# Altium PCB GPS_WS_NEO7M трафарет TOP.PcbDoc
Units mm, origin at the board's own origin, x right, y up, seen from the top; angles counter-clockwise.
Board outline 32.5 x 32.5 mm, 4 copper layers (Top Layer, GND, PWR, Bottom Layer), stack 1.17 mm thick; 17 components, 25 nets, 64 pads, 0 vias.
Unrouted connection lines stored in the file: 31.
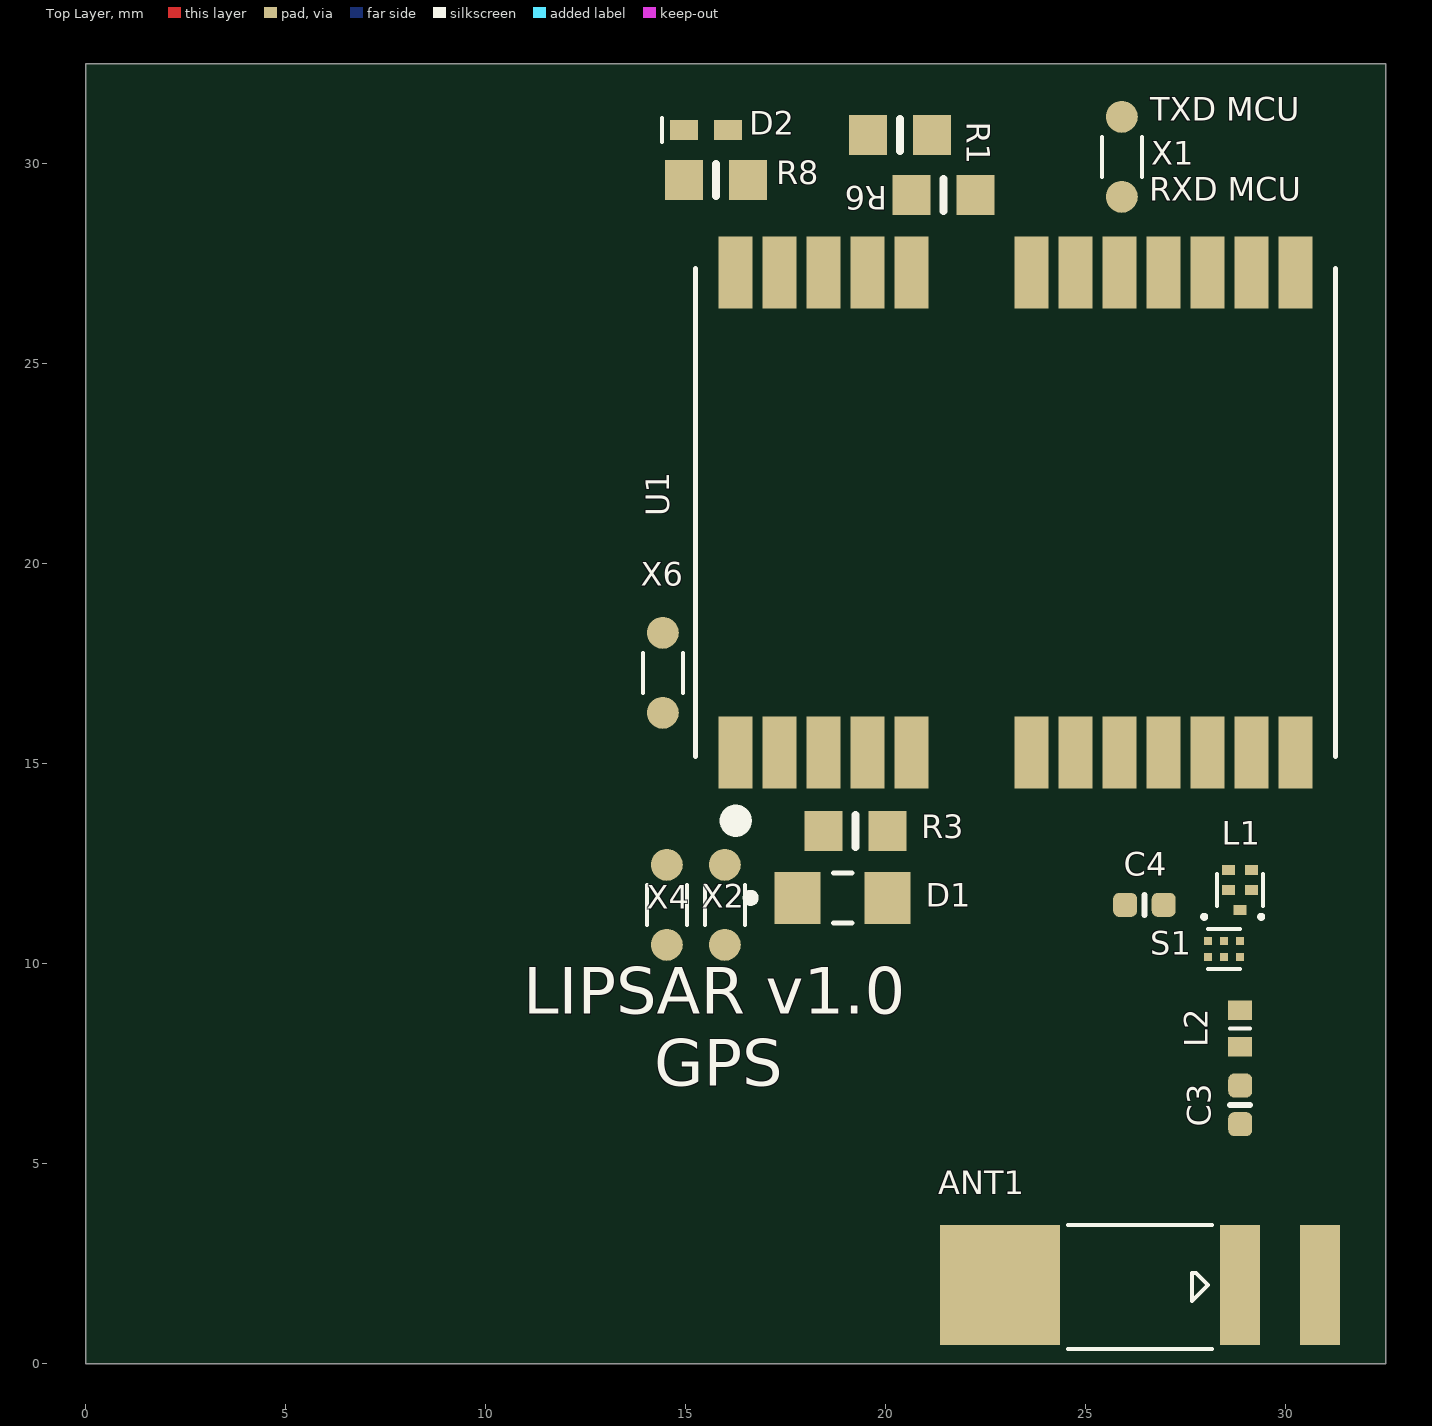
[diagram p0: Top Layer view]
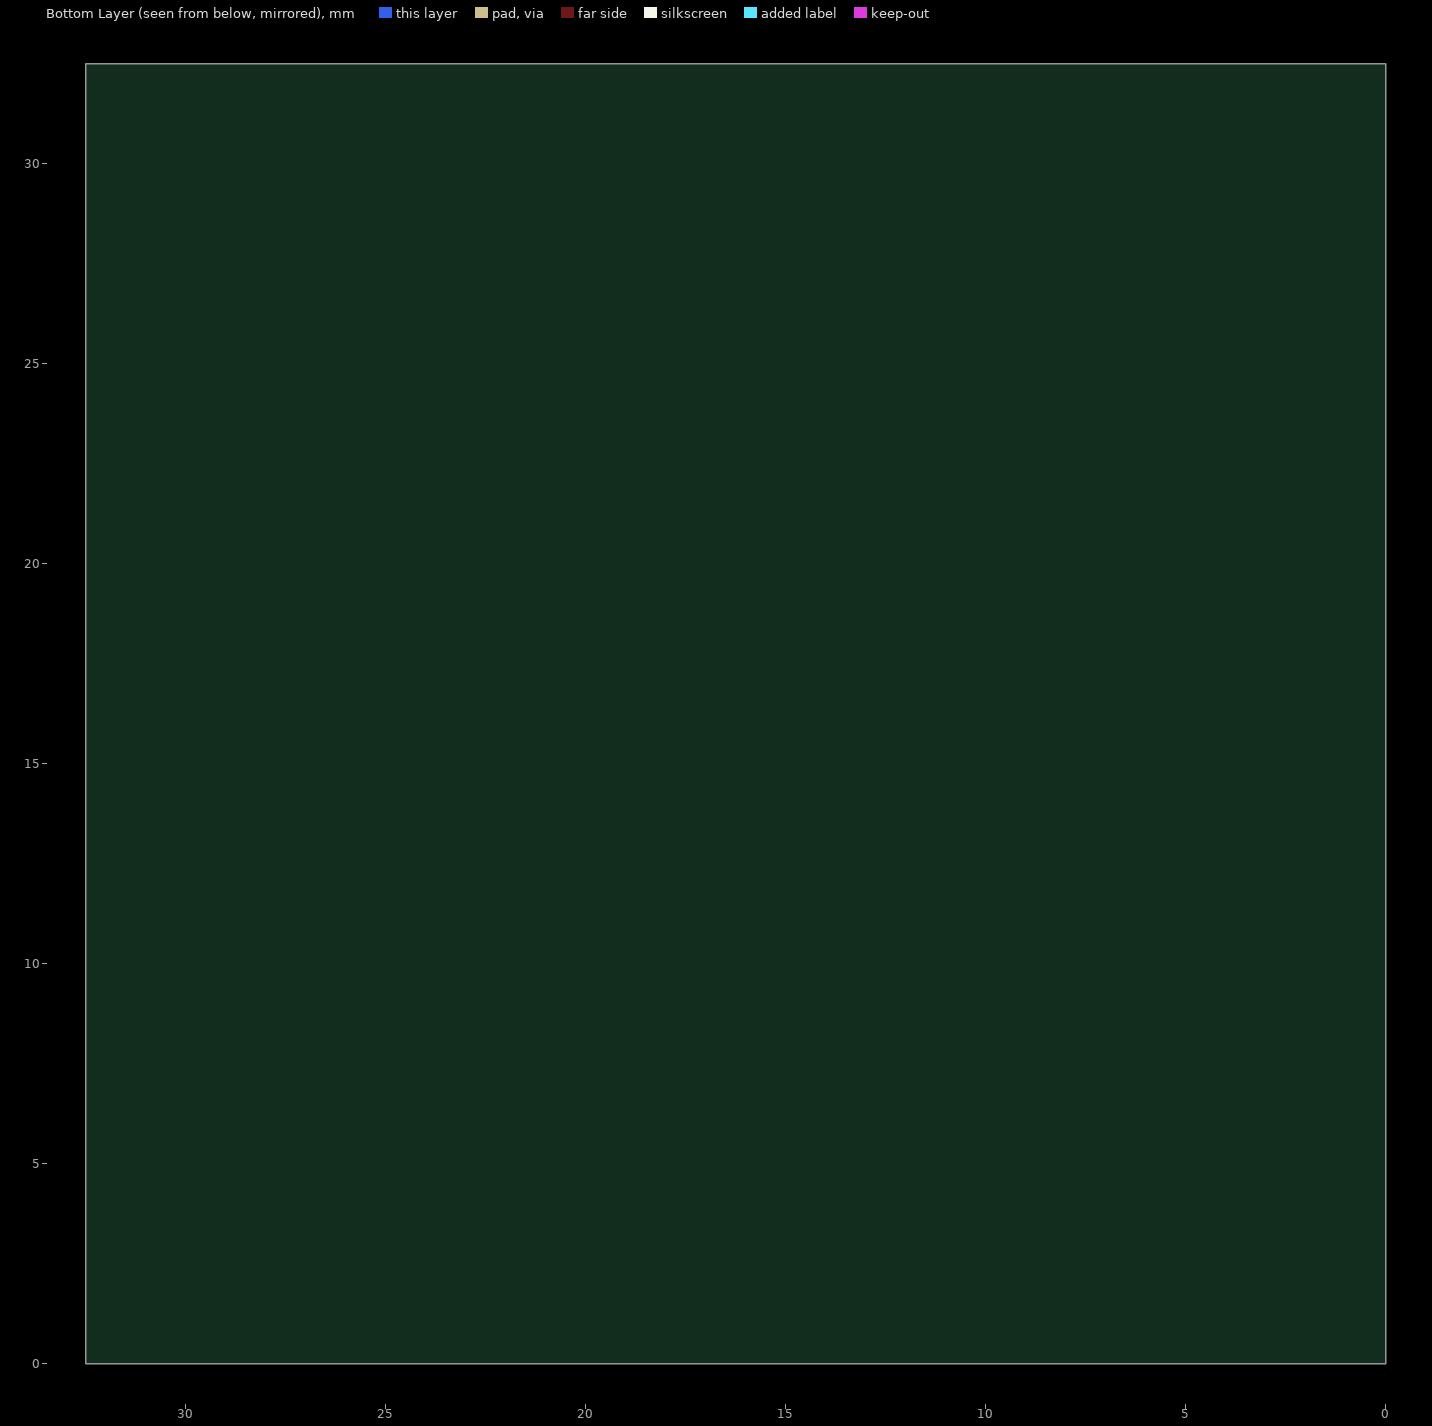
[diagram p1: Bottom Layer view, seen from below]

## Layer stack, top to bottom
Top Solder: solder mask 0.0254, SM-002, Dk 4
Top Layer: signal copper 0.045
Dielectric 2: prepreg 0.125, FR4_HiTg170 PR, Dk 5.07
Dielectric 3: prepreg 0.125, FR4_HiTg170 PR, Dk 5.07
Dielectric 8: prepreg 0.125, FR4_HiTg170 PR, Dk 5.07
GND: signal copper 0.015
Dielectric 1: core 0.3, FR4 Tg150, Dk 4.6
PWR: signal copper 0.015
Dielectric 9: prepreg 0.125, FR4_HiTg170 PR, Dk 5.07
Dielectric 4: prepreg 0.125, FR4_HiTg170 PR, Dk 5.07
Dielectric 5: prepreg 0.125, FR4_HiTg170 PR, Dk 5.07
Bottom Layer: signal copper 0.045
Bottom Solder: solder mask 0.0254, SM-002, Dk 4

## Board outline
0,0 0,32.5 32.5,32.5 32.5,0

## Design rules (kind name [scope] priority, off if disabled: settings)
AcuteAngle [All] p1: minimum=3.50000000000000E+0001 checktracksonly=FALSE
BoardOutlineClearance "BoardOutlineClearance 1" [All] p1: gap=0.25 ignorepadtopadclearanceinfootprint=FALSE except(0: Arc-SplitContinuation Track-SplitContinuation SMDPad-SplitContinuation THPad-SplitContinuation Via-SplitContinuation Fill-SplitContinuation Poly-SplitContinuation Region-SplitContinuation Text-SplitContinuation) // Milling
BoardOutlineClearance "BoardOutlineClearance 2" [All] p2: gap=0.4 ignorepadtopadclearanceinfootprint=FALSE except(0: Arc-SplitContinuation Track-SplitContinuation SMDPad-SplitContinuation THPad-SplitContinuation Via-SplitContinuation Fill-SplitContinuation Poly-SplitContinuation Region-SplitContinuation Text-SplitContinuation) // V-Cut
Clearance "Stitching GND" [IsStitchingVia and InNet('GND') vs (IsVia and (Not IsStitchingVia)) Or IsPad] p1: gap=0.127 ignorepadtopadclearanceinfootprint=FALSE
Clearance "Clearance-1 1/2 Oz" [All] p2: gap=0.125 ignorepadtopadclearanceinfootprint=FALSE except(0.2: Arc-Fill Arc-Poly Track-Fill Track-Poly SMDPad-SMDPad SMDPad-Fill SMDPad-Poly THPad-Fill THPad-Poly Via-Fill Via-Poly Fill-Fill Fill-Poly Poly-Poly Poly-Region Poly-Text; 0.25: Arc-Hole Track-Hole SMDPad-Hole THPad-Hole Via-Hole Fill-Hole Poly-Hole Region-Hole Text-Hole) // Standart
DiffPairsRouting "DiffPairsRouting 1 Oz" [All] p1: maxlimit=0.254 minlimit=0.2 mostfreqgap=0.254 toplayer_minwidth=0.2 toplayer_maxwidth=0.381 toplayer_prefwidth=0.381 midlayer1_minwidth=0.2 midlayer1_maxwidth=0.381 midlayer1_prefwidth=0.381 midlayer2_minwidth=0.2 midlayer2_maxwidth=0.381 midlayer2_prefwidth=0.381 bottomlayer_minwidth=0.2 bottomlayer_maxwidth=0.381 bottomlayer_prefwidth=0.381 maxuncoupledlength=12.7
DiffPairsRouting "DiffPairsRouting 1/2 Oz" [All] p2: maxlimit=0.254 minlimit=0.1 mostfreqgap=0.254 toplayer_minwidth=0.1 toplayer_maxwidth=0.381 toplayer_prefwidth=0.381 midlayer1_minwidth=0.1 midlayer1_maxwidth=0.381 midlayer1_prefwidth=0.381 midlayer2_minwidth=0.1 midlayer2_maxwidth=0.381 midlayer2_prefwidth=0.381 bottomlayer_minwidth=0.1 bottomlayer_maxwidth=0.381 bottomlayer_prefwidth=0.381 maxuncoupledlength=12.7
HoleSize "Minimum HoleSize" [IsPad] p1: absolutevalues=TRUE maxlimit=5.9 minlimit=0.6 maxpercent=80.000 minpercent=20.000
HoleSize "Minimum HoleSize VIA 1" [IsVia] p2: absolutevalues=TRUE maxlimit=5.9 minlimit=0.3 maxpercent=80.000 minpercent=20.000 // Standart
HoleToHoleClearance Hole2HoleClearance [All] p1: gap=0.25 allowstackedmicrovias=FALSE
MinimumAnnularRing "Minimum AR VIA Standart" [IsVia] p1: minimumring=0.15
MinimumAnnularRing "Minimum AR PAD Standart" [IsPAD] p2: minimumring=0.2
MinimumAnnularRing "Minimum AR VIA Advance" [IsVia] p3: minimumring=0.1
MinimumAnnularRing "Minimum AR PAD Advance" [IsPAD] p4: minimumring=0.15
MinimumSolderMaskSliver "SolderMask Bridge Standart" [All] p1: minsoldermaskwidth=0.15 // All Masks
PlaneClearance "PlaneClearance-1 1/2 Oz" [All] p1: clearance=0.2 // Standart
PlaneConnect "TermalConnect-1 1/2 Oz" [All] p1: planeconnectstyle=Direct reliefexpansion=0.2 reliefentries=4 reliefconductorwidth=0.2 reliefairgap=0.2 // Standart
PolygonConnect "PolygonConnect-1 1/2 Oz" [All] p1: connectstyle=Direct reliefconductorwidth=0.15 reliefentries=4 polygonreliefangle="90 Angle" airgapwidth=0.2 // Standart
RoutingCorners [All] p1 off: cornerstyle=45-Degree minsetback=2.54 maxsetback=2.54
RoutingVias [All] p1: holewidth=0.3 width=0.6 viastyle="Through Hole" minholewidth=0.2 minwidth=0.4 maxholewidth=5.9 maxwidth=6.4
SilkToSilkClearance Silk2SilkClearance [All] p1 off: silktosilkclearance=0.15
SilkToSolderMaskClearance Silk2SolderMaskClearance [IsPad] p1 off: minsilkscreentomaskgap=0.15 clearancetoexposedcopper=TRUE
SolderMaskExpansion [IsVia] p1: expansion=0.102 istentingtop=TRUE
SolderMaskExpansion SolderMaskExpansion-1 [All] p2: expansion=0.05 istentingtop=FALSE // Standart
SolderMaskExpansion "SolderMaskExpansion LDI" [All] p3: expansion=0.025 istentingtop=FALSE // Advance
UnRoutedNet [All] p1: checkbadconnections=TRUE
Width "Width 1/2 Oz" [All] p1: maxlimit=10 minlimit=0.1 preferedwidth=0.125 checkconnectedcopper=TRUE
20 further rules are at their usual default settings.

## Components (designator, comment, footprint, x,y, rotation, side; value= is the part's Value field where it differs from the comment)
ANT1 "GPS ANT" "ANTENNA GPS" 26.26,1.875 r180 top
C3 "STD_CAP" CAPC1005X55N 28.86,6.475 r90 top value="100 pF"
C4 "STD_CAP" CAPC1005X55N 26.464,11.475 r180 top value="1.0 uF"
D1 "7012X1" LED_7012X1 18.922,11.65 r0 top
D2 "RB520S30T1G" SOD523 15.5,30.85 r180 top
L1 "SAW" "SAW Filter" 28.86,11.35 r180 top
L2 "L0402" L0402 28.86,8.38 r90 top
R1 "STD_RES" RESC1608X50AN 20.35,30.725 r180 top value="1 kOm"
R3 "STD_RES" RESC1608X50AN 19.247,13.325 r180 top value="1 kOm"
R6 "STD_RES" RESC1608X50AN 21.447,29.225 r180 top value="1 kOm"
R8 "STD_RES" RESC1608X50AN 15.75,29.6 r0 top value="1 kOm"
S1 "BGA524N6" SW_BGS12WN6E6327XTSA1 28.46,10.375 r270 top
U1 "NEO-7M-0" XCVR_NEO-7M-0 23.247,21.278 r90 top
X1 "CON2_Uni" Con2_uni 25.9,29.175 r90 top
X2 "CON2_Uni" Con2_uni 15.975,12.475 r270 top
X4 "CON2_Uni" Con2_uni 14.525,12.475 r270 top
X6 "CON2_Uni" Con2_uni 14.425,16.275 r90 top

## Footprints (in the part's own frame and the unit in brackets; to place one, negate y for a bottom-side part, rotate by r counter-clockwise, add the part's x,y. Pads: shape width x height; smd on the part's side, far side on the other; paste and mask are expansions set on the pad)
"ANTENNA GPS" [mm]
  rect 1x3 smd: 1(-2.6,-0.1) 2(-4.6,-0.1)
  rect 3x3 smd: 3(3.4,-0.1)
  silkscreen extent -1.9,-1.6 1.7,1.5, body extent -5.1,-1.6 4.9,1.4, height 3.1
CAPC1005X55N [mm] "Chip Capacitor, 2-Leads, Body 1,0x0,5mm, IPC Medium Density"
  rrect50% 0.6x0.6 smd mask+0.05: 1(-0.483,0) 2(0.483,0)
  silkscreen extent 0,-0.25 0,0.25, body extent -0.5,-0.25 0.5,0.25, height 0.6
Con2_uni [mm]
  round 0.8 smd: 1(0,0) 2(2,0)
  silkscreen extent 0.5,-0.5 1.5,0.5
L0402 [mm]
  rect 0.49x0.6 smd: 1(-0.455,0) 2(0.455,0)
  silkscreen extent 0,-0.25 0,0.25, body extent -0.5,-0.25 0.5,0.25, height 0.44
LED_7012X1 [mm]
  rect 1.15x1.3 smd: A(1.125,0) C(-1.125,0)
  silkscreen extent -2.4,-0.63 0.23,0.63, body extent -1,-0.62 1,0.62, height 0.73
RESC1608X50AN [mm] "Chip Resistor, 2-Leads, Body 1,6x0,8mm, IPC Medium Density"
  rect 0.95x1 smd: 1(-0.8,0)
  rect 0.95x1 smd mask+0.1: 2(0.8,0)
  silkscreen extent 0,-0.4 0,0.4, body extent -0.8,-0.4 0.8,0.4, height 0.5
"SAW Filter" [mm]
  rect 0.325x0.25 smd paste-1 mask+0: 1(0,0) 2(0.288,-0.5) 3(0.288,-1) 4(-0.288,-1) 5(-0.288,-0.5)
  silkscreen extent -0.58,-0.9 0.58,0.22
SOD523 [mm]
  rect 0.7x0.5 smd: 1(0.55,0) 2(-0.55,0)
  silkscreen extent 1.1,-0.3 1.1,0.3, body extent -0.79,-0.38 0.81,0.42, height 0.65
SW_BGS12WN6E6327XTSA1 [mm]
  rect 0.2x0.2 smd paste-1 mask+0: 1(-0.2,-0.4) 2(-0.2,0) 3(-0.2,0.4) 4(0.2,0.4) 5(0.2,0) 6(0.2,-0.4)
  silkscreen extent -0.85,-0.55 0.5,0.4
XCVR_NEO-7M-0 [mm]
  rect 1.8x0.85 smd: 1(-6,7) 2(-6,5.9) 3(-6,4.8) 4(-6,3.7) 5(-6,2.6) 6(-6,-0.4) 7(-6,-1.5) 8(-6,-2.6) 9(-6,-3.7) 10(-6,-4.8) 11(-6,-5.9) 12(6,-5.9) 13(6,-7) 14(6,-4.8) 15(-6,-7) 16(6,-3.7) 17(6,-2.6) 18(6,-1.5) 19(6,-0.4) 20(6,2.6) 21(6,3.7) 22(6,4.8) 23(6,5.9) 24(6,7)
  silkscreen extent -7.9,-8 6.1,8, body extent -6.1,-8 6.1,8, height 2.6

## Part data
C3: library part 3763, Dielectric="C0G (NP0)", Manufacturer=muRata, ManufacturerPartNumber=GRM1555C1H101GA01D, Temp_Range="25 to 125°C", Voltage_Range=50V, AuthorModification_Comp=anosova, BOM="Конденсатор 0402 100 pF ±2% 50V  C0G (NP0)    GRM1555C1H101GA01D muRata", Comp_Class_Name="Capacitors Chip SMD 0402", Comp_Class_Number=200003, Comp_Description="Capacitors 0402 100 pF ±2% 50V  C0G (NP0)", Comp_ID=200003-0362, ComponentLink1Description=MANUFACTURER_URL, ComponentLink1URL=http://www.murata.com/products/catalog/pdf/c02e.pdf, Footprint_Description="Chip Capacitor EIA 0402. METRIC 1005, 2-Leads, Body 1,00x0,5mm, IPC Medium Density", HelpURL=\\corp1\RNDlibrary\_Library\Altium_lib\Datasheet\muRata\Chip_Monolithic_Ceramic_Capacitors\Chip_Monolithic_Ceramic_Capacitors.pdf, Human_Readable="Конденсатор 0402 100 pF ±2% 50V  C0G (NP0)", Lib_Description=Capacitor, Number_Base=3763, Precision=±2%, Price=0,0270000007003546, TimeModification_Comp="18.11.2021 12:51:46"
C4: library part 5280, Dielectric=X5R, Manufacturer=muRata, ManufacturerPartNumber=GRM155R61A105K, Temp_Range="-55°C to +85°C", Voltage_Range=10V, AuthorCreation_Comp=asergeev, AuthorModification_Comp=anosova, BOM="Конденсатор 0402 1.0 uF ±10% 10V X5R    GRM155R61A105K muRata", Comp_Class_Name="Capacitors Chip SMD 0402", Comp_Class_Number=200003, Comp_Description="Capacitors 0402 1.0 uF ±10% 10V X5R", Comp_ID=200003-428, ComponentLink1Description=MANUFACTURER_URL, ComponentLink1URL=http://psearch.murata.com/capacitor/lineup/grm/, Footprint_Description="Chip Capacitor EIA 0402. METRIC 1005, 2-Leads, Body 1,00x0,5mm, IPC Medium Density", HelpURL=\\corp1\RNDlibrary\_Library\Altium_lib\Datasheet\muRata\Chip_Monolithic_Ceramic_Capacitors\c02e.pdf, Human_Readable="Конденсатор 0402 1.0 uF ±10% 10V X5R", Lib_Description=Capacitor, Number_Base=5280, Precision=±10%, Price=0,100000001490116, TimeCreation_Comp="03.09.2014 18:19:09", TimeModification_Comp="18.11.2021 13:11:06", Verified=N
D1: "Red - LED Indication - Discrete 1.7V 0805 (2012 Metric)", Package="0805 Visual Communications", Availability="In Stock", Check_prices=https://www.snapeda.com/parts/7012X1/Visual+Communications/view-part/?ref=eda, MF=VCC, MP=7012X1, Price=None, Purchase-URL=https://pricing.snapeda.com/search/part/7012X1/?ref=eda, SnapEDA_Link=https://www.snapeda.com/parts/7012X1/Visual+Communications/view-part/?ref=snap
D2: "Diode Schottky 30 V 200mA (DC) Surface Mount SOD-523", Package=None, Availability=Unavailable, MP=1PS79SB70, Price=None
L1 L2: "Fixed Inductors 0402", Package="0402 Murata", Availability=Bad, Check_prices=https://www.snapeda.com/parts/LQG15HN1N5S00D/Murata/view-part/1646487/?ref=eda, MF=Murata, MP=LQG15HN1N5S00D, Price=None, SnapEDA_Link=https://www.snapeda.com/parts/LQG15HN1N5S00D/Murata/view-part/1646487/?ref=snap
R1 R3 R6 R8: library part 73, Manufacturer=Yageo, ManufacturerPartNumber=RC0603JR-071KL, Power_Range=0.1W, Temp_Range="-55 °C to +155 °C", BOM="Резистор 0603 5% E24 1 кОм    RC0603JR-071KL Yageo", Comp_Class_Name="Resistors Chip SMD 0603 5% E24", Comp_Class_Number=10000403, Comp_Description="Resistor 0603 5% E24 1 kOm", Comp_ID=10000403-073, ComponentLink1Description=MANUFACTURER_URL, ComponentLink1URL=http://www.yageo.com/documents/recent/PYu-RC0603_51_RoHS_L_4.pdf, Footprint_Description="Chip Resistor EIA 0603. METRIC 1608, 2-Leads, Body 1,6x0,8mm, IPC Medium Density", HelpURL=\\CORP1\RNDlibrary\_Library\Altium_lib\Datasheet\Yageo\RC0603\PYu-RC0603_51_RoHS_L_4.pdf, Human_Readable="Резистор 0603 5% E24 1 кОм", Lib_Description=Resistor, Number_Base=73, Precision=5%, Price=0,00600000005215406, TimeModification_Comp="06.12.2011 13:32:14", Verified=N
S1: "RF Switch SPDT 50MHz to 6GHz 21dB T/R", Package=None, Availability=Unavailable, MP=BGS12WN6E6327XTSA1, Price=None
U1: "NEO-7 RF Receiver GLONASS, GNSS, GPS 1.575GHz -161dBm", Package="SMD-24 u-blox", Availability=Unavailable, MF="U-Blox America", MP=NEO-7M-0, Price=None, SnapEDA_Link=https://www.snapeda.com/parts/NEO-7M-0/U-Blox%20America%20Inc./view-part/48598/?ref=snap
X1 X2 X4 X6: "Коннектор для соединения плат"

## Nets (pads, with @x,y where several pads share a name; then routed paths per layer and width w, separated by ;. In a path a pad name is that pad's centre, name@x,y a point inside that pad or via, vN(x,y) a via of type N, cw(c..) or ccw(c..) an arc to the next point about the centre after c; other vN are vias at no path point)
3V3: D2.2 U1.23 X2.1 X4.1
ANT_ON: S1.6 U1.14
Charge_Bat: 
GND: ANT1.2 ANT1.3 C4.2 D1.C S1.1 S1.4 U1.7 U1.10 U1.12 U1.13 U1.24 X2.2 X4.2
NetANT1_1: ANT1.1 C3.1
NetBT1_1: D2.1 R8.1
NetC3_2: C3.2 L2.1
NetC7_1: 
NetD1_A: D1.A R3.1
NetL1_1: L1.1 S1.3
NetL1_2: L1.4 U1.11
NetL2_2: L2.2 S1.5
NetR1_2: R1.2 U1.21
NetR2_1: U1.8
NetR3_2: R3.2 U1.3
NetR6_2: R6.2 U1.20
RXD_MCU: R6.1 X1.1
SCL: X6.2
SCL_GPS: U1.19
SDA: X6.1
SDA_GPS: U1.18
TXD_MCU: R1.1 X1.2
Vbat: 
VBCKP: R8.2 U1.22
VCC_RF: C4.1 S1.2 U1.9
pads on no net: L1.2 L1.3 L1.5 U1.1 U1.2 U1.4 U1.5 U1.6 U1.15 U1.16 U1.17

## Silkscreen, mask and mechanical layers (free items; w line width, h text height)
Top Overlay:
  text "TXD MCU" at 26.61,30.88 h1
  text "RXD MCU" at 26.584,28.88 h1
  text "LIPSAR v1.0" at 10.936,8.359 h2
  text "GPS" at 14.205,6.559 h2